# Altium PCB RubiksPCB.PcbDoc
Units mil, origin at the board's own origin, x right, y up, seen from the top; angles counter-clockwise.
Board outline 4407.5 x 3890 mil, 2 copper layers (Top Layer, Bottom Layer); 46 components, 70 nets, 284 pads, 8 vias.
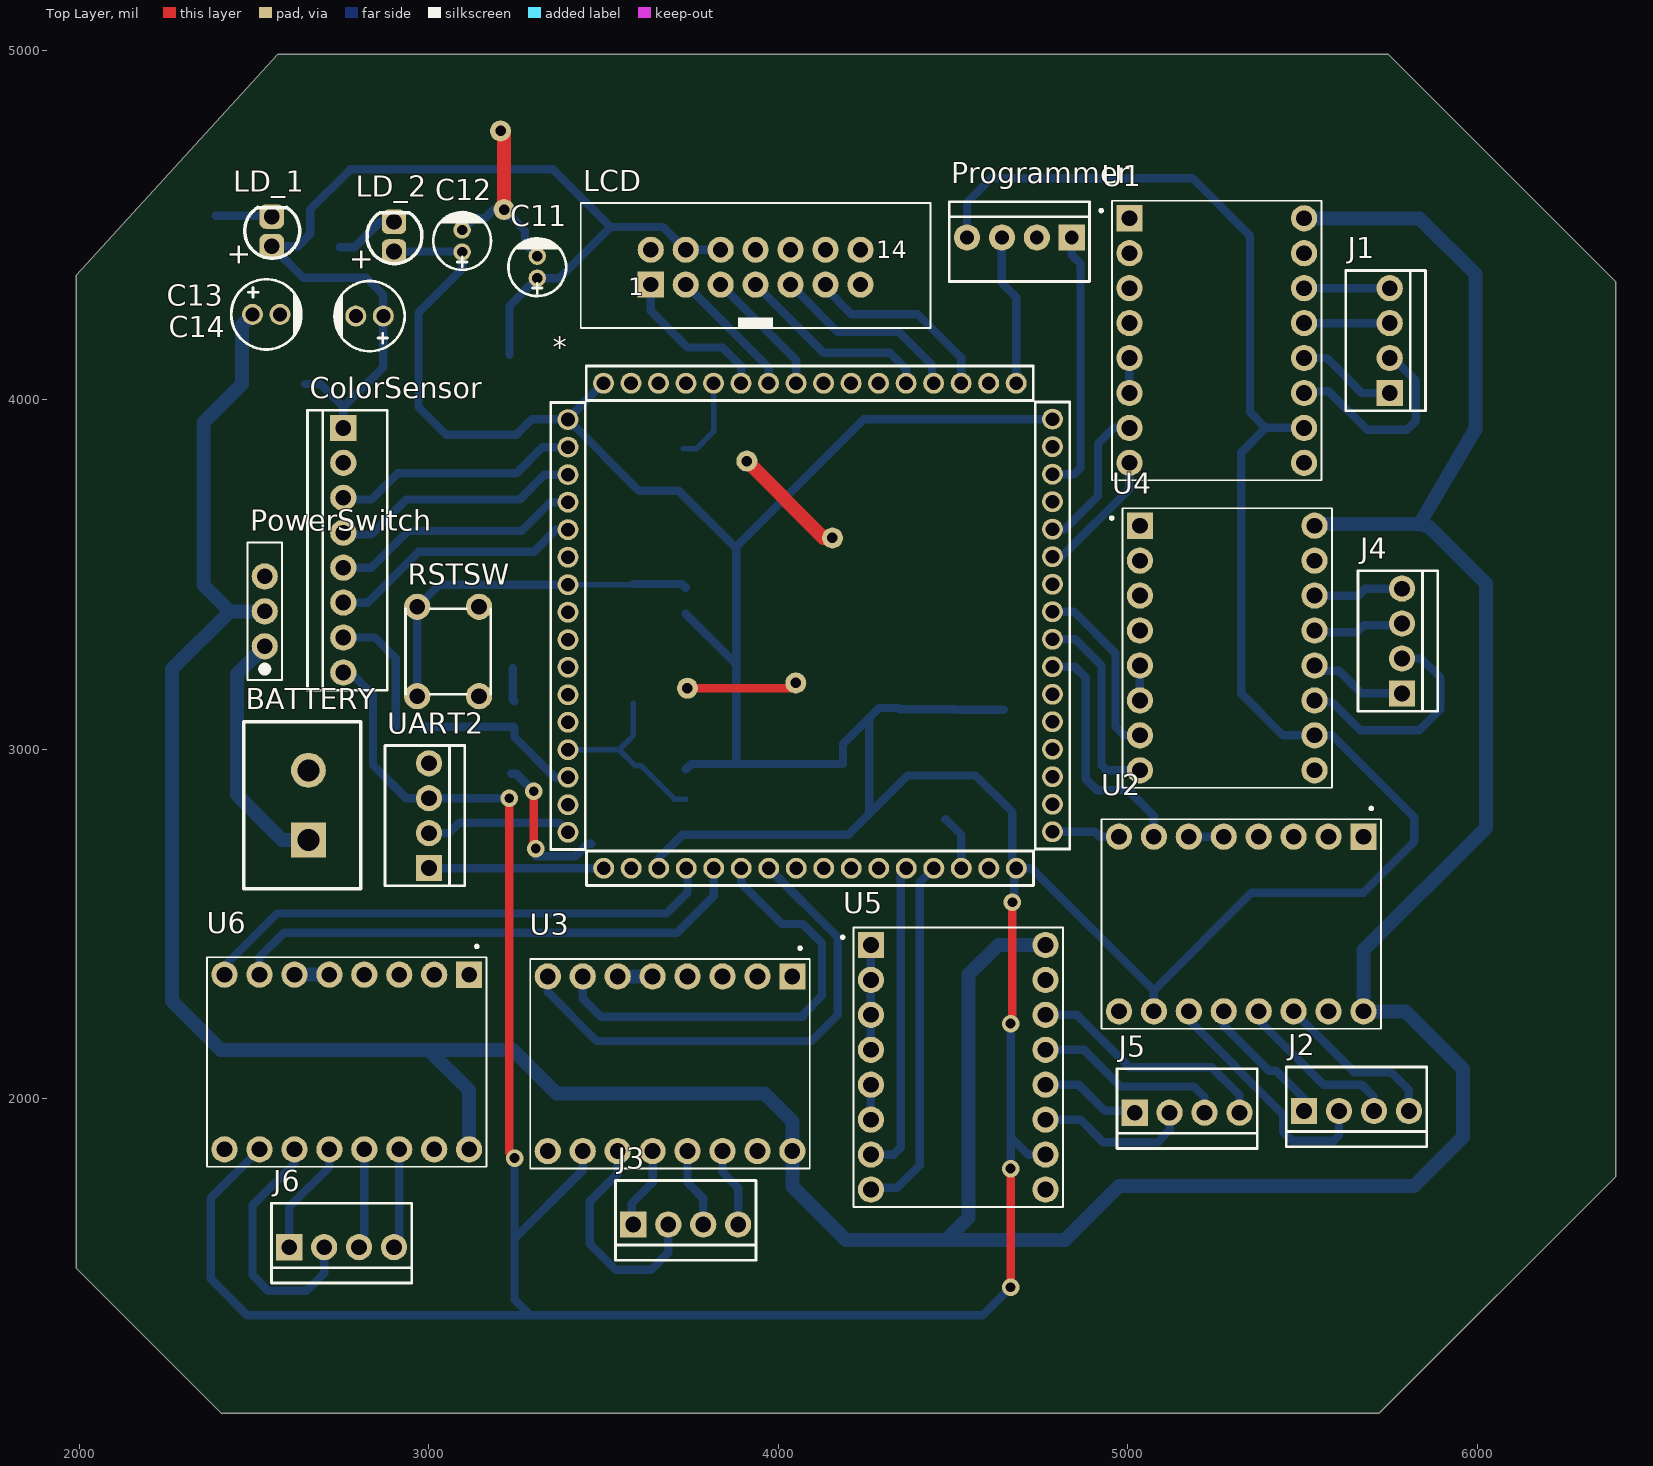
[diagram p0: Top Layer view]
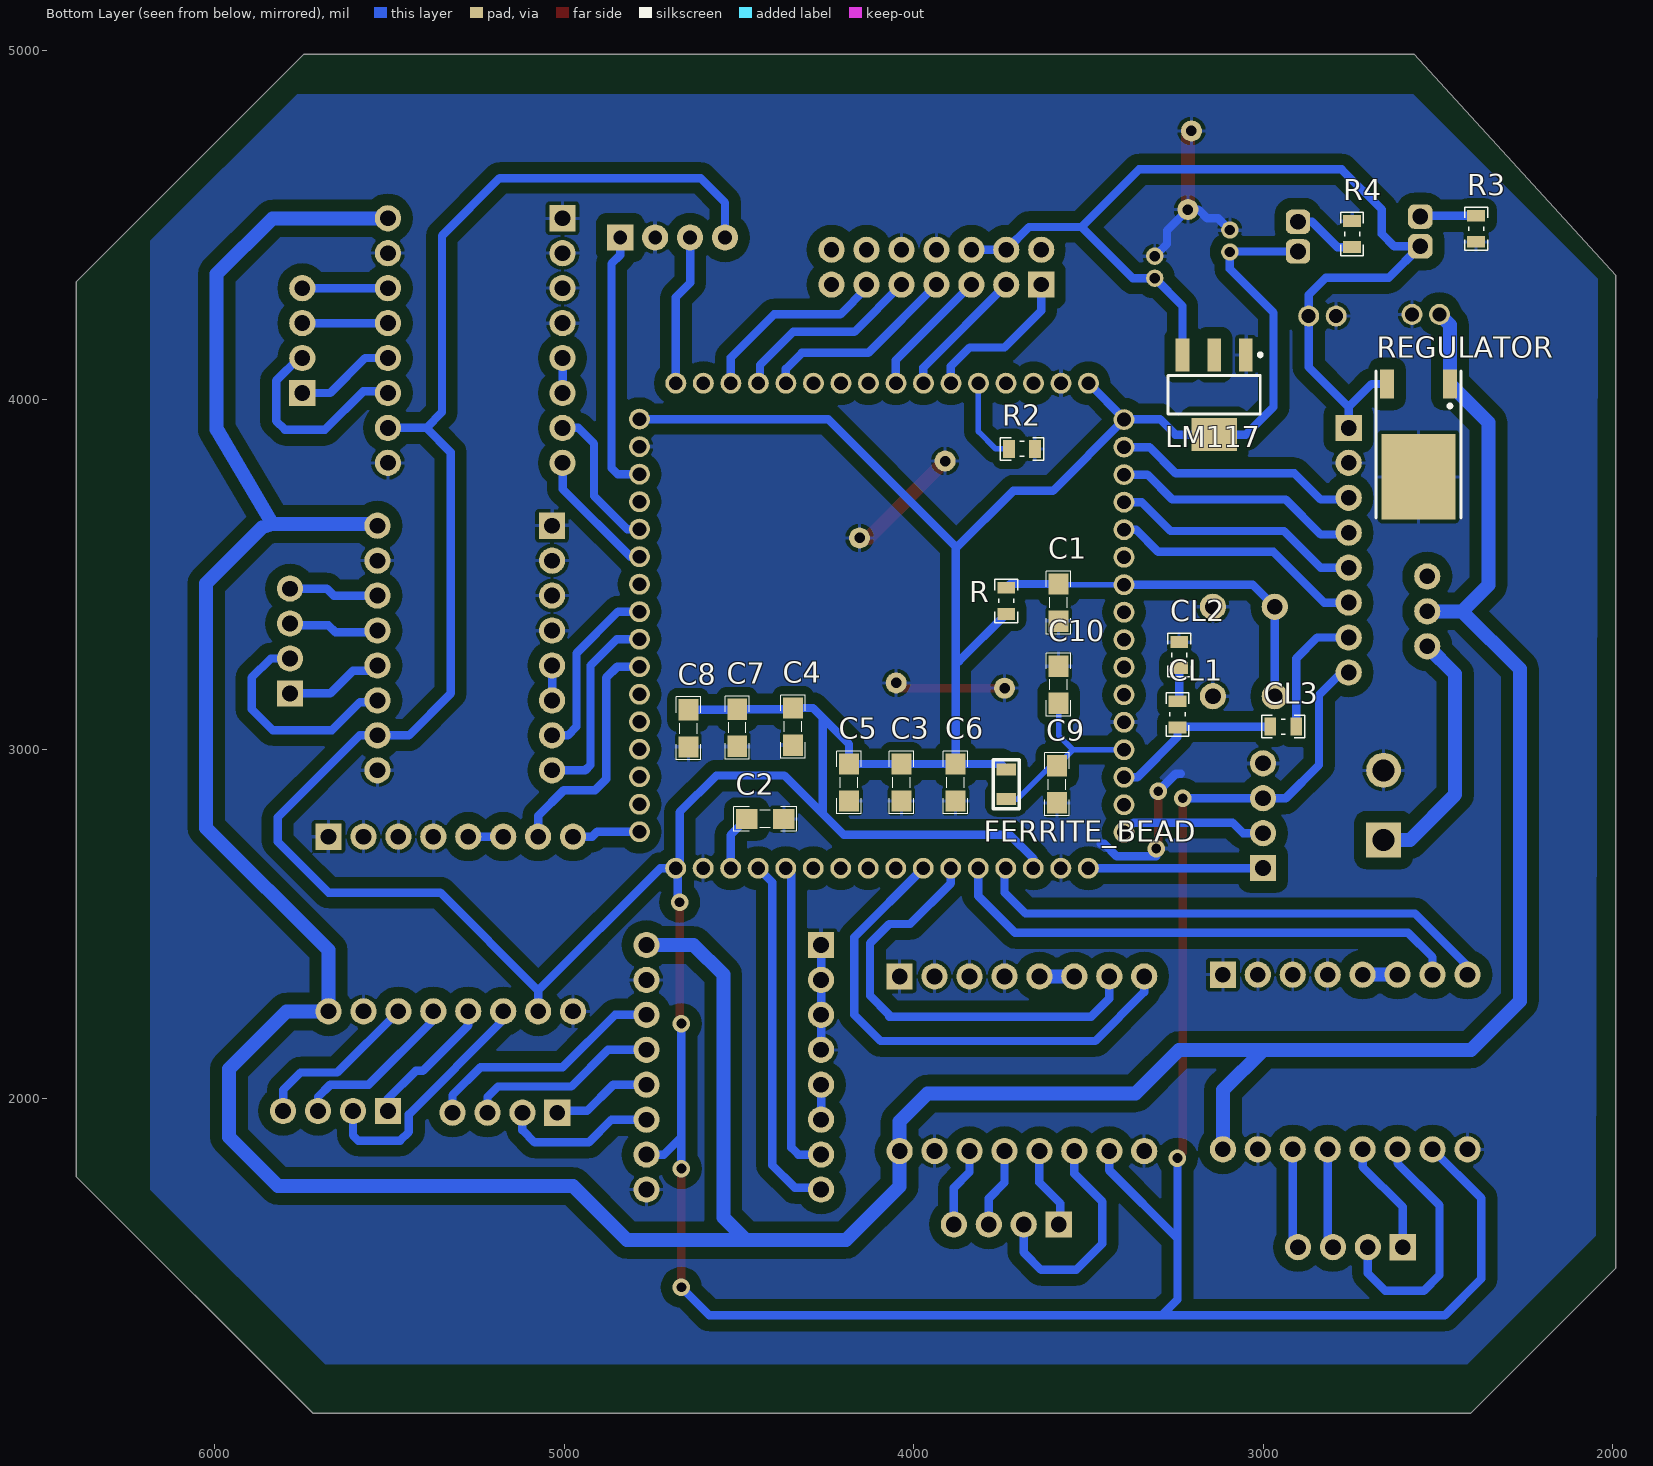
[diagram p1: Bottom Layer view, seen from below]

## Layer stack, top to bottom
Top Solder: solder mask 0.4, Solder Resist, Dk 3.5
Top Layer: signal copper 1.4
Dielectric 1: dielectric 12.6, FR-4, Dk 4.8
Bottom Layer: signal copper 1.4
Bottom Solder: solder mask 0.4, Solder Resist, Dk 3.5

## Board outline
1990,4356.45 1990,1515 2405,1100 5720,1100 6397.5,1777.5 6397.5,4337.5 5745,4990 2567.65,4990

## Design rules (kind name [scope] priority, off if disabled: settings)
Clearance [All] p1: gap=10 ignorepadtopadclearanceinfootprint=FALSE except(0: Arc-Hole Track-Hole SMDPad-Hole THPad-Hole Via-Hole Fill-Hole Poly-Hole Region-Hole Text-Hole; 33: Arc-Fill Arc-Poly Arc-Region Track-Fill Track-Poly Track-Region SMDPad-Fill SMDPad-Poly SMDPad-Region THPad-Fill THPad-Poly THPad-Region Via-Fill Via-Poly Via-Region Fill-Fill Fill-Poly Fill-Region Poly-Poly Poly-Region Region-Region)
PolygonConnect [All] p1: connectstyle=Relief reliefconductorwidth=10 reliefentries=4 polygonreliefangle="90 Angle" airgapwidth=10
RoutingVias [All] p1: holewidth=28 width=50 viastyle="Through Hole" minholewidth=28 minwidth=50 maxholewidth=28 maxwidth=50
SolderMaskExpansion [All] p1: expansion=4
Width [All] p1: maxlimit=40 minlimit=16 preferedwidth=24
30 further rules are at their usual default settings.

## Components (designator, comment, footprint, x,y, rotation, side; value= is the part's Value field where it differs from the comment)
* "STM32F411RC" STM32F411RC_ 4105,3350 r0 top
BATTERY "691311500102" 691311500102 2655,2840 r90 top
C1 "0.1uF" CAPC3413X12N 3585,3420 r270 bottom
C2 "2.2uF" CAPC3413X12N 4425,2800 r180 bottom
C3 "100nF" CAPC3413X12N 4035,2905 r90 bottom
C4 "100nF" CAPC3413X12N 4345,3065 r90 bottom
C5 "100nF" CAPC3413X12N 4185,2905 r90 bottom
C6 "100nF" CAPC3413X12N 3880,2905 r90 bottom
C7 "1uF" CAPC3413X12N 4505,3061.85 r90 bottom
C8 "10uF" CAPC3413X12N 4645,3060 r90 bottom
C9 "100nF" CAPC3413X12N 3590,2900 r90 bottom
C10 "1uF" CAPC3413X12N 3585,3185 r270 bottom
C11 "0.1uF" "cap 00" 3310,4380 r270 top
C12 "0.1uF" "cap 00" 3095,4455 r270 top
C13 "0.33uf" "cap 01" 2534.37,4245 r180 top
C14 "0.1uf" "cap 01" 2830,4240 r0 top
CL1 "10K" RES0805 3245,3100 r90 bottom
CL2 "10K" RES0805 3240,3270 r270 bottom
CL3 "10K" RES0805 2942.4,3065 r180 bottom
ColorSensor "" 61900811121 2755,3570 r90 top
FERRITE_BEAD "350mA" "0805 (2012) Capacitor" 3735,2900 r90 bottom
J1 "61900411121" 61900411121#1 5750,4170 r270 top
J2 "61900411121" 61900411121#1 5655,1965 r180 top
J3 "61900411121" 61900411121#1 3735,1640 r180 top
J4 "61900411121" 61900411121#1 5785,3310 r270 top
J5 "61900411121" 61900411121#1 5170,1960 r180 top
J6 "61900411121" 61900411121#1 2750,1575 r180 top
LCD "61201421621" 61201421621 3935,4380 r0 top
LD_1 "SMD 1206 LED" LED-3mm 2555,4480 r180 top
LD_2 "SMD 1206 LED" LED-3mm 2905,4465 r180 top
LM117 "" SOT223_N 3140,4015 r270 bottom
PowerSwitch "450301014042" 450301014042 2530,3395 r270 top
Programmer "" 61900411121#2 4690,4465 r0 top
R "100k" RES0805 3735,3425 r270 bottom
R2 "10K" RES0805 3690,3860 r0 bottom
R3 "330E" RES0805 2390,4490 r90 bottom
R4 "220E" RES0805 2745,4475 r270 bottom
REGULATOR "L78M05" TO-252 2555,3912.87 r0 bottom
RSTSW "430156050736" 4301x60507x6_6x6x5 3055,3280 r90 top
U1 "A4988_STEPPER_MOTOR_DRIVER_CARRIER" *MODULE_A4988_STEPPER_MOTOR_DRIVER_CARRIER 5255,4170 r0 top
U2 "A4988_STEPPER_MOTOR_DRIVER_CARRIER" *MODULE_A4988_STEPPER_MOTOR_DRIVER_CARRIER 5325,2500 r270 top
U3 "A4988_STEPPER_MOTOR_DRIVER_CARRIER" *MODULE_A4988_STEPPER_MOTOR_DRIVER_CARRIER 3690.19,2100 r270 top
U4 "A4988_STEPPER_MOTOR_DRIVER_CARRIER" *MODULE_A4988_STEPPER_MOTOR_DRIVER_CARRIER 5285,3290 r0 top
U5 "A4988_STEPPER_MOTOR_DRIVER_CARRIER" *MODULE_A4988_STEPPER_MOTOR_DRIVER_CARRIER 4515,2090 r0 top
U6 "A4988_STEPPER_MOTOR_DRIVER_CARRIER" *MODULE_A4988_STEPPER_MOTOR_DRIVER_CARRIER 2765,2105 r270 top
UART2 "" 61900411121#1 3000,2810 r270 top

## Footprints (in the part's own frame and the unit in brackets; to place one, negate y for a bottom-side part, rotate by r counter-clockwise, add the part's x,y. Pads: shape width x height; smd on the part's side, far side on the other; paste and mask are expansions set on the pad)
"0805 (2012) Capacitor" [mm] "0805 (2012) Capacitor"
  rect 0.85x1.4 smd: 1(-1.075,0) 2(1.075,0)
  silkscreen extent -1.78,-0.95 1.78,0.95, body extent -1.19,-0.65 1.19,0.65, height 0.85
4301x60507x6_6x6x5 [mm] "6x6mm Tact Switch, THT version"
  round 1.905 hole 1.143: 1(-3.25,2.25) 2(-3.25,-2.25) 3(3.25,2.25) 4(3.25,-2.25)
  silkscreen extent -3.1,-3.1 3.1,3.1, body extent -3.95,-3.1 3.95,3.1, height 5.05
61201421621 [mm] "14 pins, straight, gold plating"
  rect 1.9x1.9 hole 1.1: 1(-7.62,-1.27)
  round 1.9 hole 1.1: 2(-7.62,1.27) 3(-5.08,-1.27) 4(-5.08,1.27) 5(-2.54,-1.27) 6(-2.54,1.27) 7(0,-1.27) 8(0,1.27) 9(2.54,-1.27) 10(2.54,1.27) 11(5.08,-1.27) 12(5.08,1.27) 13(7.62,-1.27) 14(7.62,1.27)
  silkscreen extent -12.72,-4.42 12.72,4.68, body extent -12.72,-4.42 12.72,4.75, height 9.13
61900411121#1 [mil] "2.54mm Male Locking Header, 4p"
  rect 75x75 hole 45: 1(150,0)
  round 75 hole 45: 2(50,0) 3(-50,0) 4(-150,0)
  silkscreen extent -201,-126 201,102, body extent -200,-126 200,102, height 455
61900411121#2 [mil] "2.54mm Male Locking Header, 4p"
  rect 74.8x74.8 hole 39.37: 1(150,0)
  round 74.8 hole 39.37: 2(50,0) 3(-50,0) 4(-150,0)
  silkscreen extent -201,-126 201,102, body extent -200,-126 200,102, height 455
61900811121 [mil] "2.54mm Male Locking Header, 8p"
  rect 75x75 hole 45: 1(350,0)
  round 75 hole 45: 2(250,0) 3(150,0) 4(50,0) 5(-50,0) 6(-150,0) 7(-250,0) 8(-350,0)
  silkscreen extent -401,-126 401,102, body extent -400,-126 400,102, height 455
450301014042 [mil] "10mm*2.5mm. SPDT, ON-ON, 2.54mm, horizontal type, THT, bulk"
  round 75 hole 45: 1(0,0) 2(-100,0) 3(100,0)
  silkscreen extent -197,-49 197,49, body extent -197,-49 197,49, height 254
691311500102 [mm] "5,08mm - PCB Headers - Vertical - Closed ends -02p"
  rect 2.54x2.54 hole 1.6: 1(-2.54,0)
  round 2.54 hole 1.6: 2(2.54,0)
  silkscreen extent -6.08,-3.8 6.08,4.7, body extent -6.08,-3.8 6.08,4.7, height 12.02
*MODULE_A4988_STEPPER_MOTOR_DRIVER_CARRIER [mil]
  rect 75x75 hole 45: 1(-250,350)
  round 75 hole 45: 2(-250,250) 3(-250,150) 4(-250,50) 5(-250,-50) 6(-250,-150) 7(-250,-250) 8(-250,-350) 9(250,-350) 10(250,-250) 11(250,-150) 12(250,-50) 13(250,50) 14(250,150) 15(250,250) 16(250,350)
  silkscreen extent -335,-400 300,400
"cap 00" [mil]
  round 50 hole 30: 1(31.5,0) 2(-31.5,0)
  silkscreen extent -83,-83 83,83
"cap 01" [mil]
  round 60 hole 40: 1(39.37,0) 2(-39.37,0)
  silkscreen extent -100,-100 100,100, body extent -99,-99 99,99, height 494
CAPC3413X12N [mm] "Chip Capacitor, 2-Leads, Body 3/40x1/30mm, IPC Medium Density-Design:Abbas Basereh"
  rect 1.55x1.45 smd: 1(-1.35,0) 2(1.35,0)
  silkscreen extent -2.29,-0.89 2.29,0.89, body extent -1,-0.63 1,0.62, height 0.78
LED-3mm [mil] "LED; 2 Leads"
  rrect50% 70x70 hole 45: 1(5,40) 2(5,-45)
  silkscreen extent -75,-71 82,75
RES0805 [mm] "Chip Resistor, 2-Leads, Body 2/00x1/25mm, IPC Medium Density DESIGNER:ABBAS BASEREH"
  rect 0.85x1.3 smd: 1(-0.95,0) 2(0.95,0)
  silkscreen extent -1.58,-0.82 1.58,0.82, body extent -1.02,-0.65 1.03,0.65, height 0.5
SOT223_N [mm] "SOT223, 4-Leads, Body 6.5x3.5mm, Pitch 2.3mm, Lead Span 7mm, IPC Medium Density"
  rect 2.4x1 smd: 1(-2.9,2.3) 2(-2.9,0) 3(-2.9,-2.3)
  rect 2.4x3.3 smd: 4(2.9,0)
  silkscreen extent -3.02,-3.35 1.4,3.47, body extent -1.85,-3.35 1.85,3.35, height 1.7
STM32F411RC_ [mm] "LQFP64"
  round 1.52 hole 1: 1(-17.958,15.08) 2(-17.958,13.08) 3(-17.958,11.08) 4(-17.958,9.08) 5(-17.958,7.08) 6(-17.958,5.08) 7(-17.958,3.08) 8(-17.958,1.08) 9(-17.958,-0.92) 10(-17.958,-2.92) 11(-17.958,-4.92) 12(-17.958,-6.92) 13(-17.958,-8.92) 14(-17.958,-10.92) 15(-17.958,-12.92) 16(-17.958,-14.92) 17(-15.363,-17.534) 18(-13.363,-17.534) 19(-11.363,-17.534) 20(-9.363,-17.534) 21(-7.363,-17.534) 22(-5.363,-17.534) 23(-3.363,-17.534) 24(-1.363,-17.534) 25(0.637,-17.534) 26(2.637,-17.534) 27(4.637,-17.534) 28(6.637,-17.534) 29(8.637,-17.534) 30(10.637,-17.534) 31(12.637,-17.534) 32(14.637,-17.534) 33(17.272,-14.884) 34(17.272,-12.884) 35(17.272,-10.884) 36(17.272,-8.884) 37(17.272,-6.884) 38(17.272,-4.884) 39(17.272,-2.884) 40(17.272,-0.884) 41(17.272,1.116) 42(17.272,3.116) 43(17.272,5.116) 44(17.272,7.116) 45(17.272,9.116) 46(17.272,11.116) 47(17.272,13.116) 48(17.272,15.116) 49(14.625,17.728) 50(12.625,17.728) 51(10.625,17.728) 52(8.625,17.728) 53(6.625,17.728) 54(4.625,17.728) 55(2.625,17.728) 56(0.625,17.728) 57(-1.375,17.728) 58(-3.375,17.728) 59(-5.375,17.728) 60(-7.375,17.728) 61(-9.375,17.728) 62(-11.375,17.728) 63(-13.375,17.728) 64(-15.375,17.728)
  silkscreen extent -19.21,-18.78 18.52,18.98, body extent -19.21,-18.79 18.52,18.98, height 4.35
TO-252 [mm] "D-PAK/TO-252-AA; 3 Leads (1 Cropped); Body 10.1 (inc. leads) x 6.6 mm (LxW max)"
  rect 1x2.1 smd: 1(-2.285,-3.375) 3(2.285,-3.375)
  rect 5.4x6.2 smd: 4(0,3.375)
  silkscreen extent -3.08,-4.32 3.09,6.38, body extent -3.27,-4.11 3.27,5.83, height 2.39

## Part data
BATTERY: "WR-TBL Serie 311 - 5.08 mm Close Vertical PCB Header, 02p", ComponentLink1Description=Manufacturer, ComponentLink1URL=http://www.we-online.de, ComponentLink2Description=Datasheet, ComponentLink2URL=http://katalog.we-online.de/em/datasheet/6913115001xx.pdf, Part Number=691311500102, Pin Number=02p, Pitch="5.08 mm", Published Date="Feb. 2017", Publisher="Wurth Elektronik"
C1 C2 C3 C4 C5 C6 C7 C8 C9 C10: library part "CAP SMD 0805", "CAP 0805", Data=16-12-2016, Desc.="CAP SMD 0805", Designer="Abbas Basereh"
C11 C12: library part CAP_Polar, "Polar Capacitor", Company="SJ Libraries", ComponentLink1Description=Datasheet, ComponentLink2Description=Reference, Designer="Eng. Saeid Jorablo", HelpURL=http://s3.picofile.com/file/7443264187/Coming_Soon_logo.gif, Mounting Technology="Surface Mount\Through-Hole", Publisher="SJ Unlimited", Status=Unreleased
C13 C14: library part CAP_Polar, "Polar Capacitor", Voltage=16V, Company="SJ Libraries", ComponentLink1Description=Datasheet, ComponentLink2Description=Reference, Designer="Eng. Saeid Jorablo", HelpURL=http://s3.picofile.com/file/7443264187/Coming_Soon_logo.gif, Mounting Technology="Surface Mount\Through-Hole", Publisher="SJ Unlimited", Status=Unreleased
CL1 CL2 CL3 R R2 R3 R4: library part "RES SMD PACKAGE", "TOTAL SMD RESISTOR PACK", Data=2017-3-10, Desc.="RES SMD PAKAGES", Designer="Abbas Basereh"
ColorSensor: library part 61900811121, "WR-WTB 2.54mm Male Locking Header, 8p", ComponentLink1Description=Manufacturer, ComponentLink1URL=http://www.we-online.de, ComponentLink2Description=Datasheet, ComponentLink2URL=http://katalog.we-online.de/em/datasheet/6190xx11121.pdf, Part Number=61900811121, Pin Number=8, Pitch="2.54 mm", Published Date="June 2017", Publisher="Wurth Elektronik"
FERRITE_BEAD: library part "Ferrite Beads", "Ferrite Beads"
J1 J2 J3 J4 J5 J6: "WR-WTB 2.54mm Male Locking Header, 4p", ComponentLink1Description=Manufacturer, ComponentLink1URL=http://www.we-online.de, ComponentLink2Description=Datasheet, ComponentLink2URL=http://katalog.we-online.de/em/datasheet/6190xx11121.pdf, Part Number=61900411121, Pin Number=4, Pitch="2.54 mm", Published Date="June 2017", Publisher="Wurth Elektronik"
LCD: "WR-BHD 2.54mm Male Box Header", Manufacturer="Wurth Elektronik", ComponentLink1 Description=Manufacturer, ComponentLink1URL=http://www.we-online.com, ComponentLink2 Description=Datasheet, ComponentLink2URL=http://katalog.we-online.de/em/datasheet/6120xx21621.pdf, Created by="Baojun Chen", Created Date="March 2016", NoPins=14, partNo=61201421621
LD_1 LD_2: library part "LED 3mm", "Typical LED"
LM117: library part LM1117DT-1.8, "x.x Volt, 800mA Low-Dropout Linear Regulator, 3-pin TO-252", Manufacturer="National Semiconductor", PackageTopMarking=NSUZXYTT*LM1117*DT-X.X, PartNumber=LM1117DT-3.3, PowerWise=N, Code_JEDEC=TO-252-AA, ComponentLink1Description="LM1117 Datasheet", ComponentLink1URL=http://www.national.com/ds/LM/LM1117.pdf, ComponentLink2Description="LM1117 Web Page", ComponentLink2URL=http://www.national.com/pf/LM/LM1117.html, ComponentLink3Description="TD03B Package Page", ComponentLink3URL=http://www.national.com/packaging/folders/td03b.html, CompType="LDO IC", DatasheetVersion=Apr-2006, PackageDescription="TO252, Molded, Jedec, 6.8 x 6.10 x 2.30mm Body, 3 Lead, 2.28mm Pitch, Surface Mount", PackageReference=TD03B, PackageVersion="revD, Feb-2009", PinCount=3, RoHS=N, Supplier 1=Farnell, Supplier 2=Farnell
PowerSwitch: "WS-SLTV 10x2.5 mm THT", ComponentLink1Description=Manufacturer, ComponentLink1URL=http://www.we-online.de, ComponentLink2Description=Datasheet, ComponentLink2URL=http://katalog.we-online.de/em/datasheet/450301014042.pdf, Part Number=450301014042, Published Date="June 2017", Publisher="Wurth Elektronik"
Programmer UART2: library part 61900411121, "WR-WTB 2.54mm Male Locking Header, 4p", ComponentLink1Description=Manufacturer, ComponentLink1URL=http://www.we-online.de, ComponentLink2Description=Datasheet, ComponentLink2URL=http://katalog.we-online.de/em/datasheet/6190xx11121.pdf, Part Number=61900411121, Pin Number=4, Pitch="2.54 mm", Published Date="June 2017", Publisher="Wurth Elektronik"
REGULATOR: "Precision 500mA Regulator"
RSTSW: "WS-TATV 6x6mm Tact Switch, THT version", ComponentLink1Description=Manufacturer, ComponentLink1URL=http://www.we-online.de, ComponentLink2Description=Datasheet, ComponentLink2URL=http://katalog.we-online.de/em/datasheet/4301x6xxx7x6.pdf, Life Cycle="200000 cycles", Operation Force=360g, Part Number=430156050736, Published Date="June 2017", Publisher="Wurth Elektronik", Size="6x6x5 mm"
U1 U2 U3 U4 U5 U6: "Stepper Motor Driver", Package=None, Availability=Unavailable, MF=Pololu, MP="A4988 STEPPER MOTOR DRIVER CARRIER", Price=None, SnapEDA_Link=https://www.snapeda.com/parts/A4988%20STEPPER%20MOTOR%20DRIVER%20CARRIER/Pololu/view-part/1499394/?ref=snap

## Free pads (board coordinates)
  round 60 hole 30: 2(3205,4770) 3(3215,4545) 4(3910,3825) 5(4155,3605) 6(3740,3175) 7(4050,3190)

## Via types
v1: diameter 50, hole 28, Top Layer to Bottom Layer, 8 vias

## Nets (pads, with @x,y where several pads share a name; then routed paths per layer and width w, separated by ;. In a path a pad name is that pad's centre, name@x,y a point inside that pad or via, vN(x,y) a via of type N, cw(c..) or ccw(c..) an arc to the next point about the centre after c; other vN are vias at no path point)
5V: C11.1 C14.1 ColorSensor.1 LCD.4 LCD.6 LD_1.1 LM117.3 REGULATOR.3 | length 2977.7
  Bottom Layer w24: REGULATOR.3 2689.25,4045.75 2755,3980 ; ColorSensor.1 2755,3980 ; LM117.3 3230.55,4269.06 C11.1 3373.5,4348.5 3520,4495 ; LCD.6 LCD.4 3670,4495 3520,4495 ; 2755,3980 2869.37,4094.37 C14.1 2869.37,4300.63 2820,4350 2640,4350 LD_1.1 2625,4440 2660,4475 2660,4545 2775,4660 3355,4660 3520,4495
12V: C13.1 PowerSwitch.1 REGULATOR.1 U1.16 U2.16 U3.16 U4.16 U5.16 U6.16 | length 11583.3
  Bottom Layer w40: C13.1 2465.04,4215.04 REGULATOR.1 2355,3935.71 2355,3470 2430,3395 ; PowerSwitch.1 2430,3395 ; U6.16 3115,2024.4 2999.4,2140 ; U5.16 4630,2440 4545,2355 4545,1660 4480,1595 ; U1.16 5835,4520 5995,4360 5995,3915.77 5835,3645 ; U4.16@5550,3645 5835,3645 ; 2430,3395 2265,3230 2265,2280 2405,2140 2999.4,2140 ; 2999.4,2140 3240,2140 3365,2015 3960,2015 4040.19,1934.81 U3.16 4040.19,1749.21 4194.4,1595 4480,1595 ; 4480,1595 4820,1595 4975,1750 5820,1750 5960,1890 5960,2085 5795,2250 U2.16 5675,2425 6025,2775 6025,3475 5865,3635 5835,3645
BOOT0: *.60 R2.2 | length 246.1
  Bottom Layer w16: R2.2 3765,3860 3814.66,3909.66 *.60
ColorOUT: CL3.2 ColorSensor.7 | length 369.9
  Bottom Layer w24: ColorSensor.7 2845,3320 2905,3260 CL3.2
ColorOUT1: *.14 CL1.1 CL3.1 | length 504.8
  Bottom Layer w24: CL3.1@2987.2,3057.6 CL3.1 3242.6,3065 CL1.1 3245,3035 3359.91,2920.09 *.14
DIR1: *.43 U1.8 | length 375.2
  Bottom Layer w24: *.43 4811.4,3551.4 5005,3745 U1.8
DIR2: *.33 U2.8 | length 195.8
  Bottom Layer w24: *.33 4906,2764 4920,2750 U2.8
DIR3: *.23 U3.8 | length 1465.4
  Bottom Layer w24: U3.8 3340.19,2304.81 3480,2165 4095,2165 4170,2240 4170,2462.3 *.23
DIR4: *.40 U4.8 | length 572.4
  Bottom Layer w24: *.40 4849.82,3315.18 4925,3240 4925,2955 4940,2940 U4.8
DIR5: *.29 U5.8 | length 1035.3
  Bottom Layer w24: U5.8 4270,1745 4340,1745 4405,1810 4405,2619.63 *.29
DIR6: *.20 U6.8 | length 1508.2
  Bottom Layer w24: U6.8 2415,2380 2565,2530 3680,2530 3740,2590 3740,2656.08 *.20
GND: *.12 *.18 *.31 *.47 *.63 BATTERY.2 C1.2 C2.2 C3.1 C4.1 C5.1 C6.1 C7.1 C8.1 C9.1 C10.1 C11.2 C12.2 C13.2 C14.2 CL2.1 ColorSensor.2 LCD.8 LCD.10 LM117.1 pad.2 pad.3 pad.4 pad.5 pad.6 pad.7 Programmer.2 R2.1 R3.1 R4.1 REGULATOR.4 RSTSW.2 RSTSW.4 U1.1 U1.2 U1.3 U1.4 U1.9 U1.15 U2.1 U2.2 U2.3 U2.4 U2.9 U2.15 U3.1 U3.2 U3.3 U3.4 U3.9 U3.15 U4.1 U4.2 U4.3 U4.4 U4.9 U4.15 U5.1 U5.2 U5.3 U5.4 U5.9 U5.15 U6.1 U6.2 U6.3 U6.4 U6.9 U6.15 UART2.4 | length 1960.8
  Top Layer w24: v1(3300,2880) 3300,2722 v1(3306,2716) ; pad.6 4035,3175 pad.7
  Top Layer w40: pad.2 3215,4760 pad.3 ; pad.4 4130,3605 pad.5
  Bottom Layer w24: C12.2 3128.5,4520 3160,4520 3185,4545 pad.3 3275,4485 3275,4446.5 C11.2 ; 3235,2930 3250,2930 v1(3300,2880) v1@3310,2870 ; v1(3306,2716) 3306,2694 3419,2694 3455,2730 3465,2730 ; U5.4 U5.3 U5.2 U5.1
NetCL1_2: CL1.2 CL2.2 | length 97.3
  Bottom Layer w24: CL2.2 3240,3142.4 CL1.2
NetJ1_1: J1.1 U1.12 | length 286.4
  Bottom Layer w24: U1.12 5570,4120 5670,4020 J1.1
NetJ1_2: J1.2 U1.11 | length 594.9
  Bottom Layer w24: U1.11 5510,4025 5575,4025 5685,3915 5800,3915 5825,3940 5825,4055 5760,4120 J1.2
NetJ1_3: J1.3 U1.13 | length 245
  Bottom Layer w24: U1.13 J1.3
NetJ1_4: J1.4 U1.14 | length 245
  Bottom Layer w24: U1.14 J1.4
NetJ2_1: J2.1 U2.12 | length 392
  Bottom Layer w24: U2.12 5275,2210 5405,2080 5425,2080 5505,2000 J2.1
NetJ2_2: J2.2 U2.11 | length 703.4
  Bottom Layer w24: U2.11 5175,2225 5445,1955 5445,1905 5470,1880 5590,1880 5605,1895 J2.2
NetJ2_3: J2.3 U2.13 | length 486.1
  Bottom Layer w24: U2.13 5375,2225 5560,2040 5670,2040 5705,2005 J2.3
NetJ2_4: J2.4 U2.14 | length 483.2
  Bottom Layer w24: U2.14 5650,2075 5755,2075 5805,2025 J2.4
NetJ3_1: J3.1 U3.12 | length 237
  Bottom Layer w24: J3.1 3580,1645 3580,1700 3640.19,1760.19 U3.12
NetJ3_2: J3.2 U3.11 | length 655
  Bottom Layer w24: U3.11 3540.19,1785.19 3460,1705 3460,1585 3535,1510 3635,1510 3685,1560 J3.2
NetJ3_3: J3.3 U3.13 | length 228.6
  Bottom Layer w24: U3.13 3740.19,1759.81 3785,1715 J3.3
NetJ3_4: J3.4 U3.14 | length 228.6
  Bottom Layer w24: U3.14 3840.19,1789.81 3885,1745 J3.4
NetJ4_1: J4.1 U4.12 | length 271.1
  Bottom Layer w24: U4.12@5545,3225 5605,3225 5670,3160 5775,3160 J4.1@5785,3150
NetJ4_2: J4.2 U4.11 | length 635.8
  Bottom Layer w24: U4.11@5540,3135 5585,3135 5665,3055 5835,3055 5895,3115 5895,3205 5840,3260 J4.2
NetJ4_3: J4.3 U4.13 | length 253.3
  Bottom Layer w24: U4.13@5540,3335 5655,3335 5675,3355 J4.3@5785,3355
NetJ4_4: J4.4 U4.14 | length 248.3
  Bottom Layer w24: U4.14@5545,3440 5660,3440 5680,3460 J4.4
NetJ5_1: J5.1 U5.12 | length 288.1
  Bottom Layer w24: U5.12 4860,2040 4935,1965 5015,1965 J5.1
NetJ5_2: J5.2 U5.11 | length 446.4
  Bottom Layer w24: U5.11 4865,1940 4930,1875 5085,1875 5120,1910 J5.2
NetJ5_3: J5.3 U5.13 | length 555.9
  Bottom Layer w24: U5.13 4875,2140 4980,2035 5190,2035 5220,2005 J5.3
NetJ5_4: J5.4 U5.14 | length 700.3
  Bottom Layer w24: U5.14 4855,2240 5005,2090 5240,2090 5320,2010 J5.4
NetJ6_1: J6.1 U6.12 | length 327.6
  Bottom Layer w24: J6.1 2600,1690 2715,1805 U6.12
NetJ6_2: J6.2 U6.11 | length 729.1
  Bottom Layer w24: U6.11 2615,1815 2495,1695 2495,1495 2540,1450 2650,1450 2700,1500 J6.2
NetJ6_3: J6.3 U6.13 | length 286.2
  Bottom Layer w24: J6.3 2815,1590 U6.13
NetJ6_4: J6.4 U6.14 | length 286.2
  Bottom Layer w24: J6.4 2915,1590 U6.14
NetLD_1_2: LD_1.2 R3.2 | length 161
  Bottom Layer w24: R3.2 2547.6,4527.4 LD_1.2
NetLD_2_2: LD_2.2 R4.2 | length 188.4
  Bottom Layer w24: R4.2 2787.6,4437.6 2860,4510 LD_2.2 LD_2.2@2897.6,4512.4
NetU1_5: U1.5 U1.6 | length 100
  Bottom Layer w24: U1.6 U1.5
NetU2_5: U2.5 U2.6 | length 100
  Bottom Layer w24: U2.6 U2.5
NetU3_5: U3.5 U3.6 | length 100
  Bottom Layer w40: U3.6 U3.5
NetU4_5: U4.5 U4.6 | length 100
  Bottom Layer w24: U4.6 U4.5
NetU5_5: U5.5 U5.6 | length 100
  Bottom Layer w24: U5.6 U5.5
NetU6_5: U6.5 U6.6 | length 100
  Bottom Layer w40: U6.6 U6.5
NRST: *.7 C1.1 R.1 RSTSW.1 RSTSW.3 | length 1055.9
  Bottom Layer w16: *.7 3583.12,3471.27 C1.1
  Bottom Layer w24: RSTSW.1 RSTSW.3 3029.73,3471.27 *.7 ; C1.1 3724.25,3473.15 R.1
PA2: *.16 UART2.2 | length 421.8
  Bottom Layer w24: UART2.2 3057.39,2760 3087.39,2790 3370.6,2790 *.16
PA3: *.17 UART2.1 | length 500.3
  Bottom Layer w24: UART2.1 3499.86,2660 *.17
PB5: *.57 LCD.5 | length 371.5
  Bottom Layer w24: LCD.5 4050.88,4114.12 *.57
PB6: *.58 LCD.3 | length 380.3
  Bottom Layer w24: LCD.3 3972.14,4092.86 *.58
PB7: *.59 LCD.1 | length 447.7
  Bottom Layer w24: LCD.1 3635,4255 3740,4150 3840,4150 3893.4,4096.6 *.59
PC10: *.51 LCD.11 | length 554.2
  Bottom Layer w24: LCD.11 4135,4320 4210,4245 4400,4245 4523.32,4121.68 *.51
PC11: *.52 LCD.9 | length 554.2
  Bottom Layer w24: LCD.9 4170,4195 4345,4195 4440,4100 4440,4052.54 *.52
PC12: *.53 LCD.7 | length 571.8
  Bottom Layer w24: LCD.7 4130,4135 4320,4135 4365.84,4089.16 *.53
S0: *.2 ColorSensor.3 | length 707.2
  Bottom Layer w24: ColorSensor.3 2760,3715 2835,3715 2910,3790 3250,3790 3324.97,3864.97 *.2
S1: *.3 ColorSensor.4 | length 716
  Bottom Layer w24: ColorSensor.4 2760,3615 2835,3615 2935,3715 3260,3715 3331.23,3786.23 *.3
S2: *.4 ColorSensor.5 | length 720.7
  Bottom Layer w24: ColorSensor.5 2835,3520 2940,3625 3265,3625 3347.49,3707.49 *.4
S3: *.5 ColorSensor.6 | length 729.5
  Bottom Layer w24: ColorSensor.6 2825,3420 2970,3565 3300,3565 3363.75,3628.75 *.5
STEP1: *.44 U1.7 | length 427.9
  Bottom Layer w24: *.44 4820.14,3630.14 4915,3725 4915,3875 4960,3920 U1.7
STEP2: *.39 U2.7 | length 696.3
  Bottom Layer w24: *.39 4848.56,3236.44 4880,3205 4880,2915 4912.12,2882.88 5001.68,2882.88 5075,2809.56 U2.7
STEP3: *.22 U3.7 | length 1292.9
  Bottom Layer w24: U3.7 3440.19,2286.58 3491.77,2235 4070,2235 4070,2240 4125,2295 4125,2445 4070,2500 4010,2500 3893.87,2616.13 *.22
STEP4: *.41 U4.7 | length 519.6
  Bottom Layer w24: *.41 4846.08,3393.92 4965,3275 4965,3065 4990,3040 U4.7
STEP5: *.28 U5.7 | length 899.7
  Bottom Layer w24: U5.7 4330,1840 4350,1860 4350,2643.37 *.28
STEP6: *.21 U6.7 | length 1502.2
  Bottom Layer w24: U6.7 2515,2405 2585,2475 3710,2475 3815.13,2580.13 *.21
SWCLK: *.49 Programmer.3 | length 433.9
  Bottom Layer w24: Programmer.3 4640,4335 4680.8,4294.2 *.49
SWDIO: *.46 Programmer.1 | length 757.6
  Bottom Layer w24: *.46 4847.62,3787.62 4865,3805 4865,4390 4840,4415 Programmer.1
VCAP: *.30 C2.1 | length 162
  Bottom Layer w16: *.30@4521.85,2661.63 *.30
  Bottom Layer w24: C2.1 4523.8,2754.35 *.30
VCC: BATTERY.1 PowerSwitch.3 | length 717
  Bottom Layer w40: PowerSwitch.3 2450,3215 2450,2870 2580,2740 BATTERY.1
VDD: *.1 *.19 *.32 *.48 *.64 C3.2 C4.2 C5.2 C6.2 C7.2 C8.2 C12.1 ColorSensor.8 FERRITE_BEAD.2 LD_2.1 LM117.4 Programmer.4 R.2 U1.10 U2.10 U3.10 U4.10 U5.10 U6.10 UART2.3 | length 17882.5
  Top Layer w24: v1(3230,2860) 3230,1845 v1(3245,1830) ; v1(4665,1460) v1(4665,1800) ; v1(4665,2215) 4670,2220 v1(4670,2562.5)
  Bottom Layer w24: U6.10 2375,1715 2375,1485 2480,1380 3290,1380 ; ColorSensor.8 2775,3220 2840,3155 2840,2955 2935,2860 UART2.3 v1(3230,2860) ; LD_2.1 3093.5,4425 C12.1 3095,4375 2970,4250 2970,3980 3050,3900 3139.17,3900 LM117.4 3250.83,3900.83 3295,3945 3396.7,3945 *.1 ; v1(3245,1830) 3245,1600 ; U3.10 3440.19,1795.19 3245,1600 ; *.64 3397.99,3946.25 *.1 ; *.19 3657.65,2687.65 3725,2755 4200,2755 4260,2815 ; FERRITE_BEAD.2 3750.83,2958.15 C6.2 ; R.2 3870,3252.6 ; Programmer.4 4540,4565 4610,4635 5185,4635 5350,4470 5350,3965 5395,3920 ; C8.2 4506.85,3113.15 C7.2 4348.15,3115 C4.2 4288.15,3118.15 4260,3090 ; v1(4665,1460) 4585,1380 3290,1380 ; v1(4665,1800) 4665,1890 ; v1(4665,2215) 4665,1890 ; v1(4670,2562.5) 4670,2560 4675,2555 4675,2653.41 *.32 ; U5.10 4715,1840 4665,1890 ; *.48 4245.1,3945.1 3880,3580 3880,3575 ; U2.10 5075,2310 ; U1.10 5395,3920 ; 3245,1600 3245,1425 3290,1380 ; *.1 3601.7,3740 3715,3740 3880,3575 ; C6.2 3880,3575 ; C6.2 C3.2 C5.2 4185,3015 4260,3090 ; 4260,2815 4370,2925 4565,2925 4670,2820 4670,2670.96 *.32 ; 4260,2815 4260,3090 ; *.32 4725.31,2659.69 5075,2310 ; 5075,2310 5355,2590 5675,2590 5820,2735 5820,2805.81 5585.81,3040 U4.10 5445,3040 5325,3160 5325,3850 5395,3920
VDDA: *.13 C9.2 C10.2 FERRITE_BEAD.1 | length 545.3
  Bottom Layer w16: *.13 3544.32,2998.83 ; C10.2 3585,3039.5 3544.32,2998.83 ; FERRITE_BEAD.1 3702.32,2857.68 3606.85,2953.15 C9.2 3544.32,2998.83
pads on no net: *.6 *.8 *.9 *.10 *.11 *.15 *.24 *.25 *.26 *.27 *.34 *.35 *.36 *.37 *.38 *.42 *.45 *.50 *.54 *.55 *.56 *.61 *.62 LCD.2 LCD.12 LCD.13 LCD.14 LM117.2 PowerSwitch.2

## Polygon pours and split planes (outlines as drawn)
GND on Bottom Layer "GND" (solid, remove dead copper, pour order 0): 2047.8,1607.2 2415,1240 5685,1240 6185,1740 6185,4455 5765,4875 2570,4875 2042.27,4347.27

## Text inside footprints (layer, text, board x,y; h text height)
LCD: Top Overlay "14" at 4280,4405 h50; Top Overlay "1" at 3570,4300 h50
LD_1: Top Overlay "+" at 2430,4450 h60 r270
LD_2: Top Overlay "+" at 2780,4435 h60 r270